# EAGLE board TLC7225 (EAGLE 6.4)
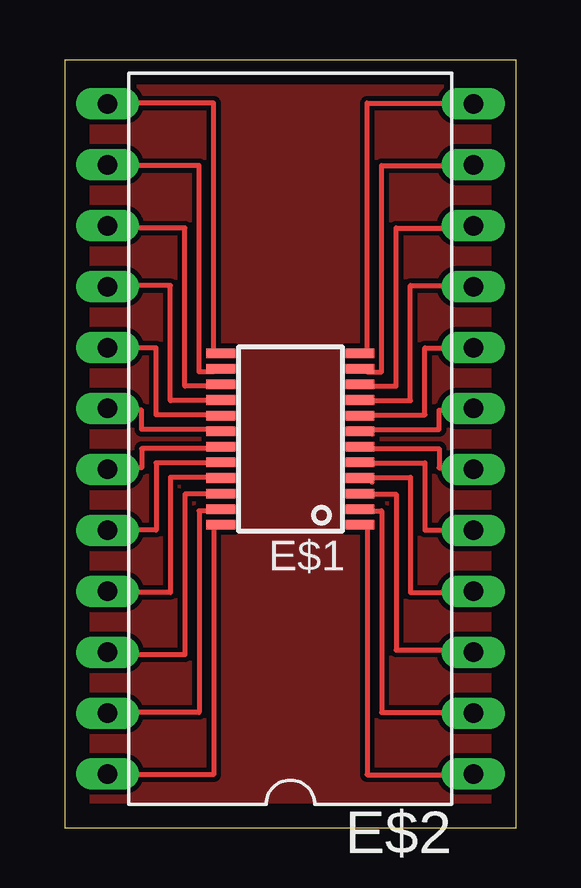
[diagram p0: board, top side]

Size 18.8 x 32 mm. Coordinates in mm from the lower left corner, seen from the top.
Outline: 0,0 18.8,0 18.8,32 0,32 0,0
Copper layers (1*16): Top 0.035mm / dielectric 1.5mm / Bottom 0.035mm
Design rules "default": minimum track width 10mil, minimum drill 24mil, track to track 8mil, track to pad 8mil, pad to pad 8mil, via to via 8mil, smd to smd 8mil, copper to edge 40mil, drill to drill 8mil, minimum pad ring 10mil, minimum via ring 8mil, stop-mask expansion 4mil, vias tented up to drill 0mil, thermal gap 10mil

## Footprints (pad centres in the part's own frame; a part is rotated, then mirrored left to right if it is on the bottom)
R-PDSO-G24 = smd 0.4 x 1.2: 1 -3.575,-2.9; 2 -2.925,-2.9; 3 -2.275,-2.9; 4 -1.625,-2.9; 5 -0.975,-2.9; 6 -0.325,-2.9; 7 0.325,-2.9; 8 0.975,-2.9; 9 1.625,-2.9; 10 2.275,-2.9; 11 2.925,-2.9; 12 3.575,-2.9; 13 3.575,2.9; 14 2.925,2.9; 15 2.275,2.9; 16 1.625,2.9; 17 0.975,2.9; 18 0.325,2.9; 19 -0.325,2.9; 20 -0.975,2.9; 21 -1.625,2.9; 22 -2.275,2.9; 23 -2.925,2.9; 24 -3.575,2.9
DIL24 = drill 0.813 long: 1 -13.97,-7.62; 2 -11.43,-7.62; 3 -8.89,-7.62; 4 -6.35,-7.62; 5 -3.81,-7.62; 6 -1.27,-7.62; 7 1.27,-7.62; 8 3.81,-7.62; 9 6.35,-7.62; 10 8.89,-7.62; 11 11.43,-7.62; 12 13.97,-7.62; 13 13.97,7.62; 14 11.43,7.62; 15 8.89,7.62; 16 6.35,7.62; 17 3.81,7.62; 18 1.27,7.62; 19 -1.27,7.62; 20 -3.81,7.62; 21 -6.35,7.62; 22 -8.89,7.62; 23 -11.43,7.62; 24 -13.97,7.62

## Placement (x,y rotation side)
E$1  [R-PDSO-G24]  9.4,16.2 90 top
E$2  [DIL24]  9.4,16.2 90 top

## Library data of the parts
E$1 E$2 = ref-packages

## Tracks (layer width: path | path; a pad name or v marks a point on that pad's centre or on a via)
1
  Top 0.2: 12.4,19.8 12.6,19.8 12.6,30.2 17,30.2
2
  Top 0.2: 12.6,19 13.2,19 13.2,27.6 17,27.6
3
  Top 0.2: 12.8,18.4 13.8,18.4 13.8,25 17,25
4
  Top 0.2: 12.8,17.8 14.4,17.8 14.4,22.6 17,22.6
5
  Top 0.2: 12.8,17.2 15,17.2 15,20 17,20
6
  Top 0.2: 12.8,16.4 12.8,16.6 15.6,16.6 15.6,17.4 17.2,17.4
7
  Top 0.2: 12.8,15.8 15.6,15.8 15.6,15 17.2,15
8
  Top 0.2: 12.8,15.2 15,15.2 15,12.4 17,12.4
9
  Top 0.2: 12.8,14.4 12.8,14.6 14.4,14.6 14.4,9.8 16.8,9.8
10
  Top 0.2: 12.6,13.9 13.8,13.9 13.8,7.4 17,7.4
11
  Top 0.2: 12.6,13.2 13.2,13.2 13.2,4.8 16.6,4.8
12
  Top 0.2: 12.6,12.6 12.6,2.2 16.4,2.2
S$1
  Top 0.2: 6.2,12.6 6.2,2.2 1.8,2.2
S$2
  Top 0.2: 6.4,13.2 5.6,13.2 5.6,4.8 1.8,4.8
S$3
  Top 0.2: 6.6,13.9 5,13.9 5,7.2 1.8,7.2
S$4
  Top 0.2: 6.2,14.6 4.4,14.6 4.4,9.8 2,9.8
S$5
  Top 0.2: 6,15.2 3.8,15.2 3.8,12.4 2,12.4
S$6
  Top 0.2: 6.2,15.8 3.2,15.8 3.2,15 1.8,15
S$7
  Top 0.2: 6,16.6 3.2,16.6 3.2,17.4 2,17.4
S$8
  Top 0.2: 6,17.2 3.8,17.2 3.8,20 2.6,20
S$9
  Top 0.2: 6,17.8 4.4,17.8 4.4,22.6 2.4,22.6
S$10
  Top 0.2: 6.2,18.4 5,18.4 5,25 2,25
S$11
  Top 0.2: 6.2,19 5.6,19 5.6,27.6 2.2,27.6
S$12
  Top 0.2: 6.2,19.8 6.2,30.2 2.2,30.2
S$13
  pour Top: 0,32 0,0 18.8,0 18.8,32
S$15
  pour Top: 6.7,12 11.9,12 11.9,1.7 6.8,1.7
S$16
  pour Top: 6.9,30.5 6.9,20.5 12.1,20.5 12.1,30.5

## Text on the board
tRestrict: B | C | A | D | V+ | RB | RC | A- | A0 | LDAC | WR | D7 | D0 | D6 | D1 | D5 | D2 | D4 | D3